# Altium PCB pulse_generator.PcbDoc
Units mm, origin at the board's own origin, x right, y up, seen from the top; angles counter-clockwise.
Board outline 77 x 87 mm, 2 copper layers (Top Layer, Bottom Layer); 35 components, 21 nets, 100 pads, 0 vias.
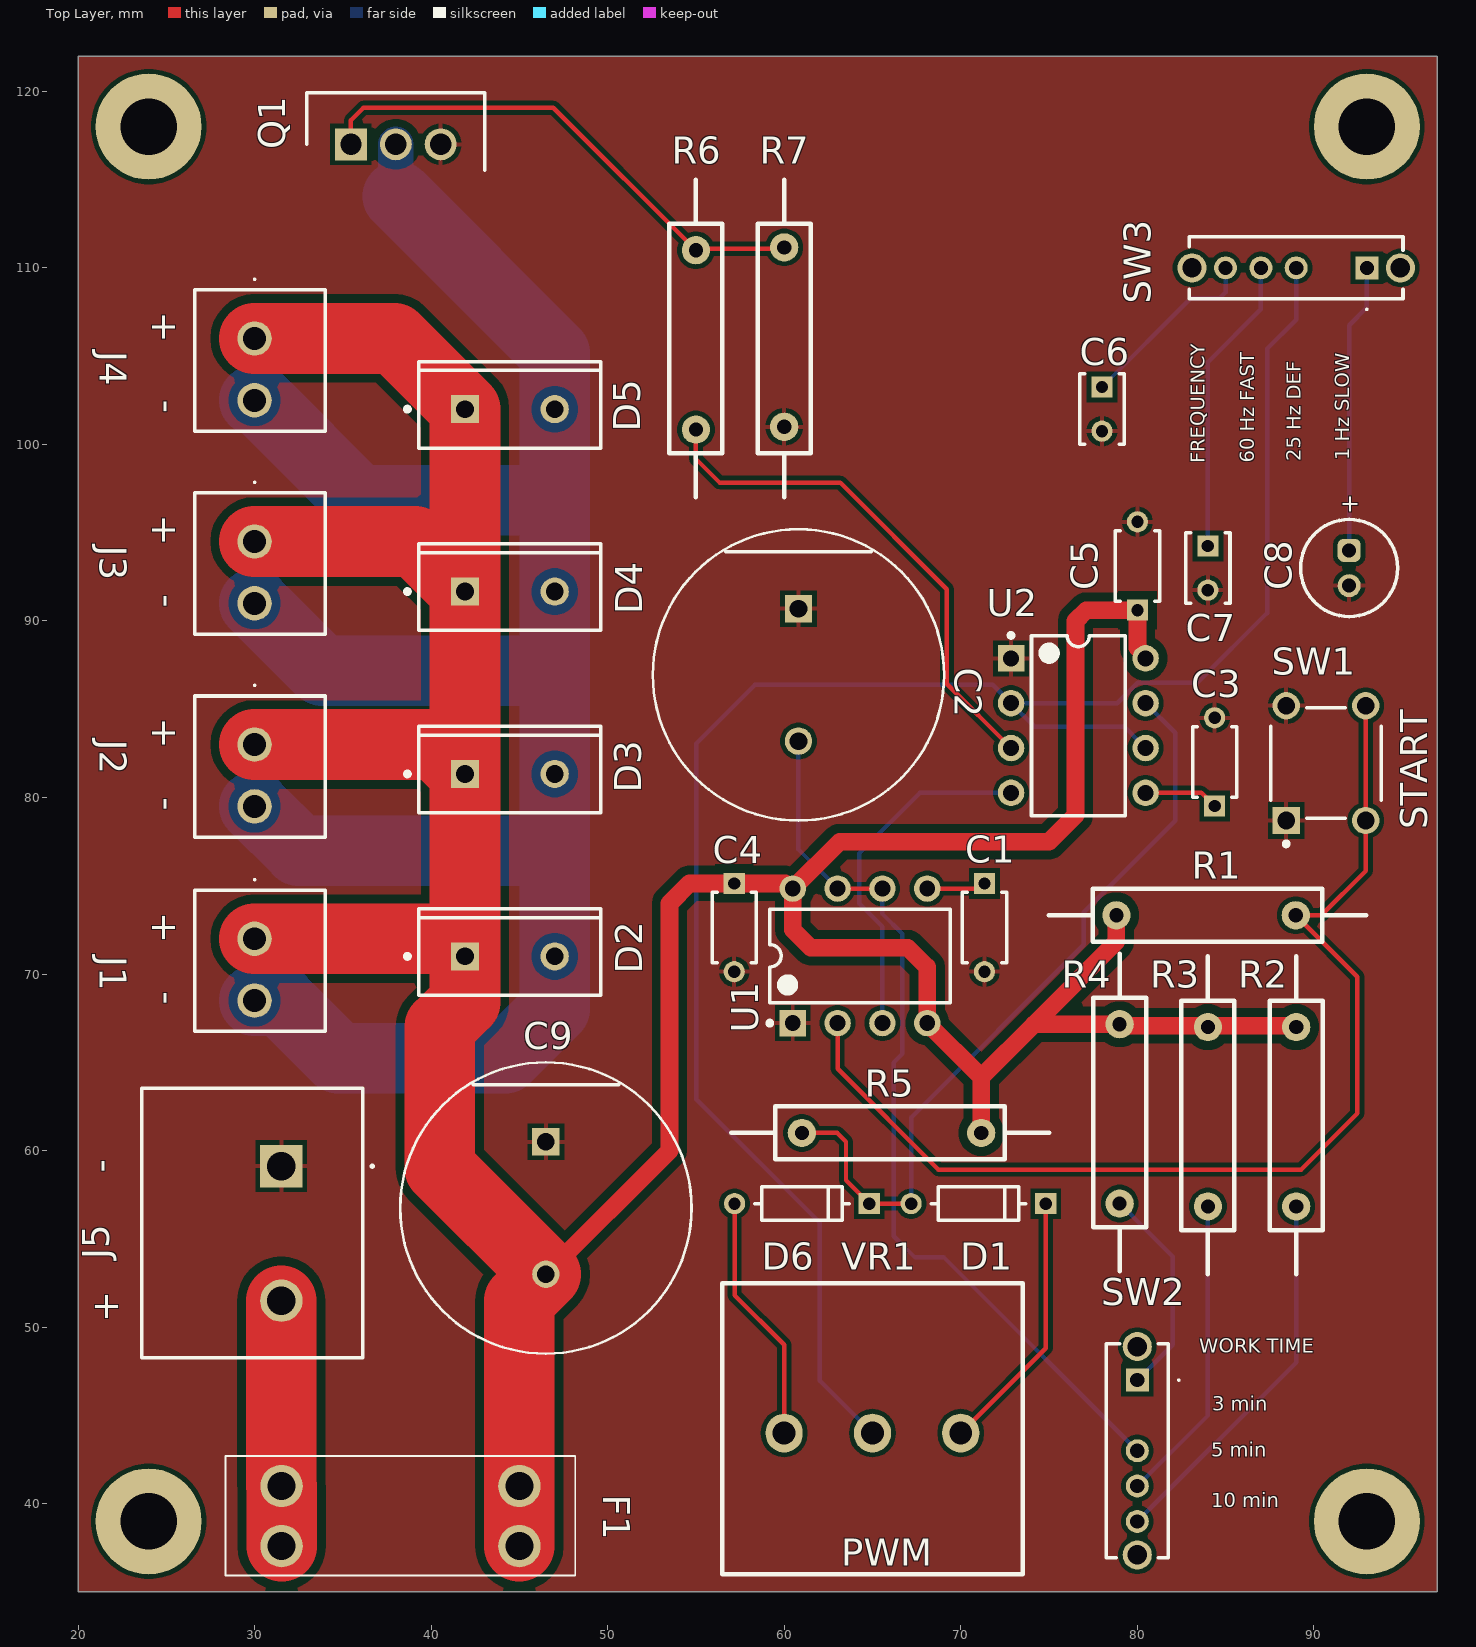
[diagram p0: Top Layer view]
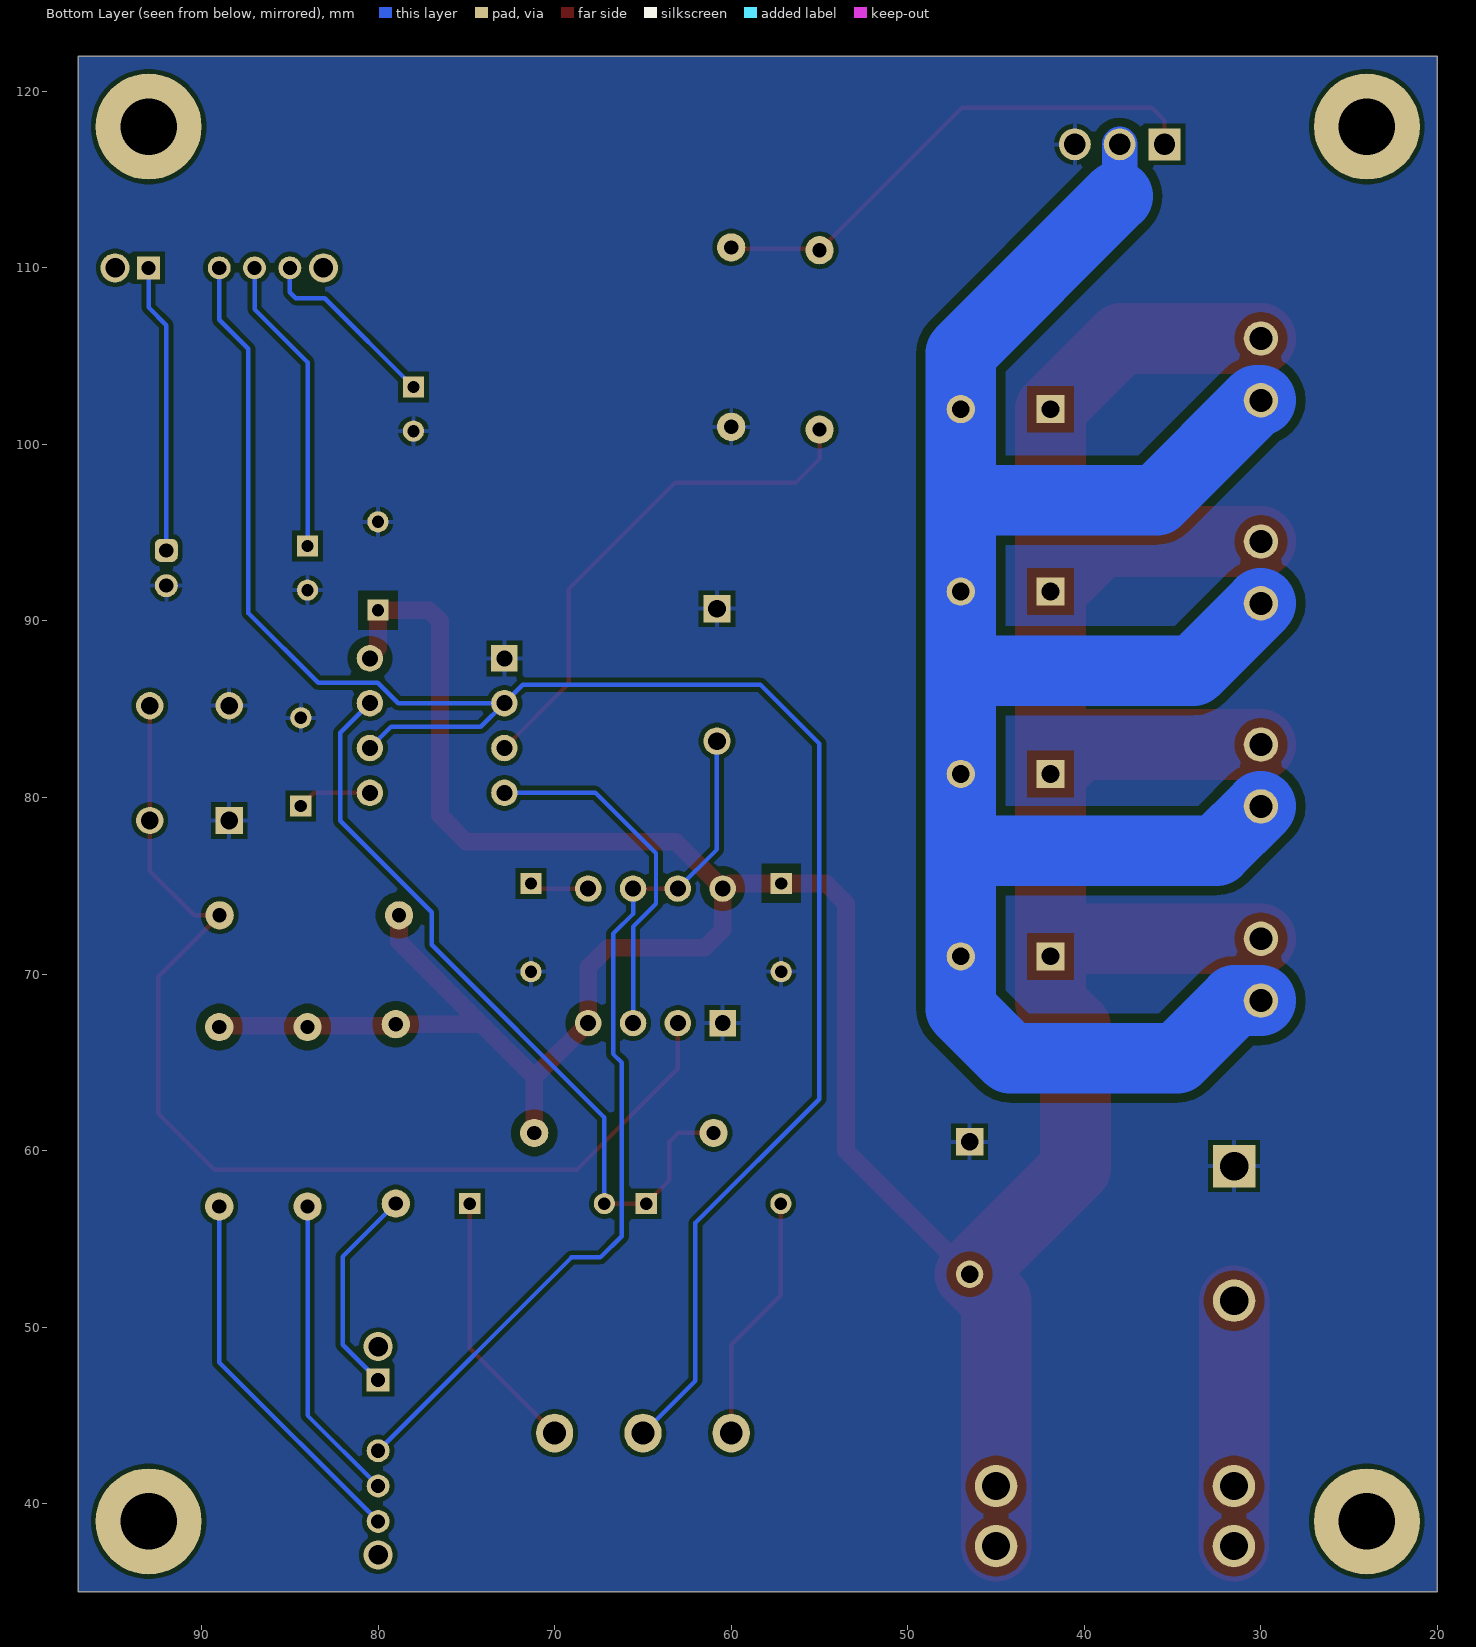
[diagram p1: Bottom Layer view, seen from below]
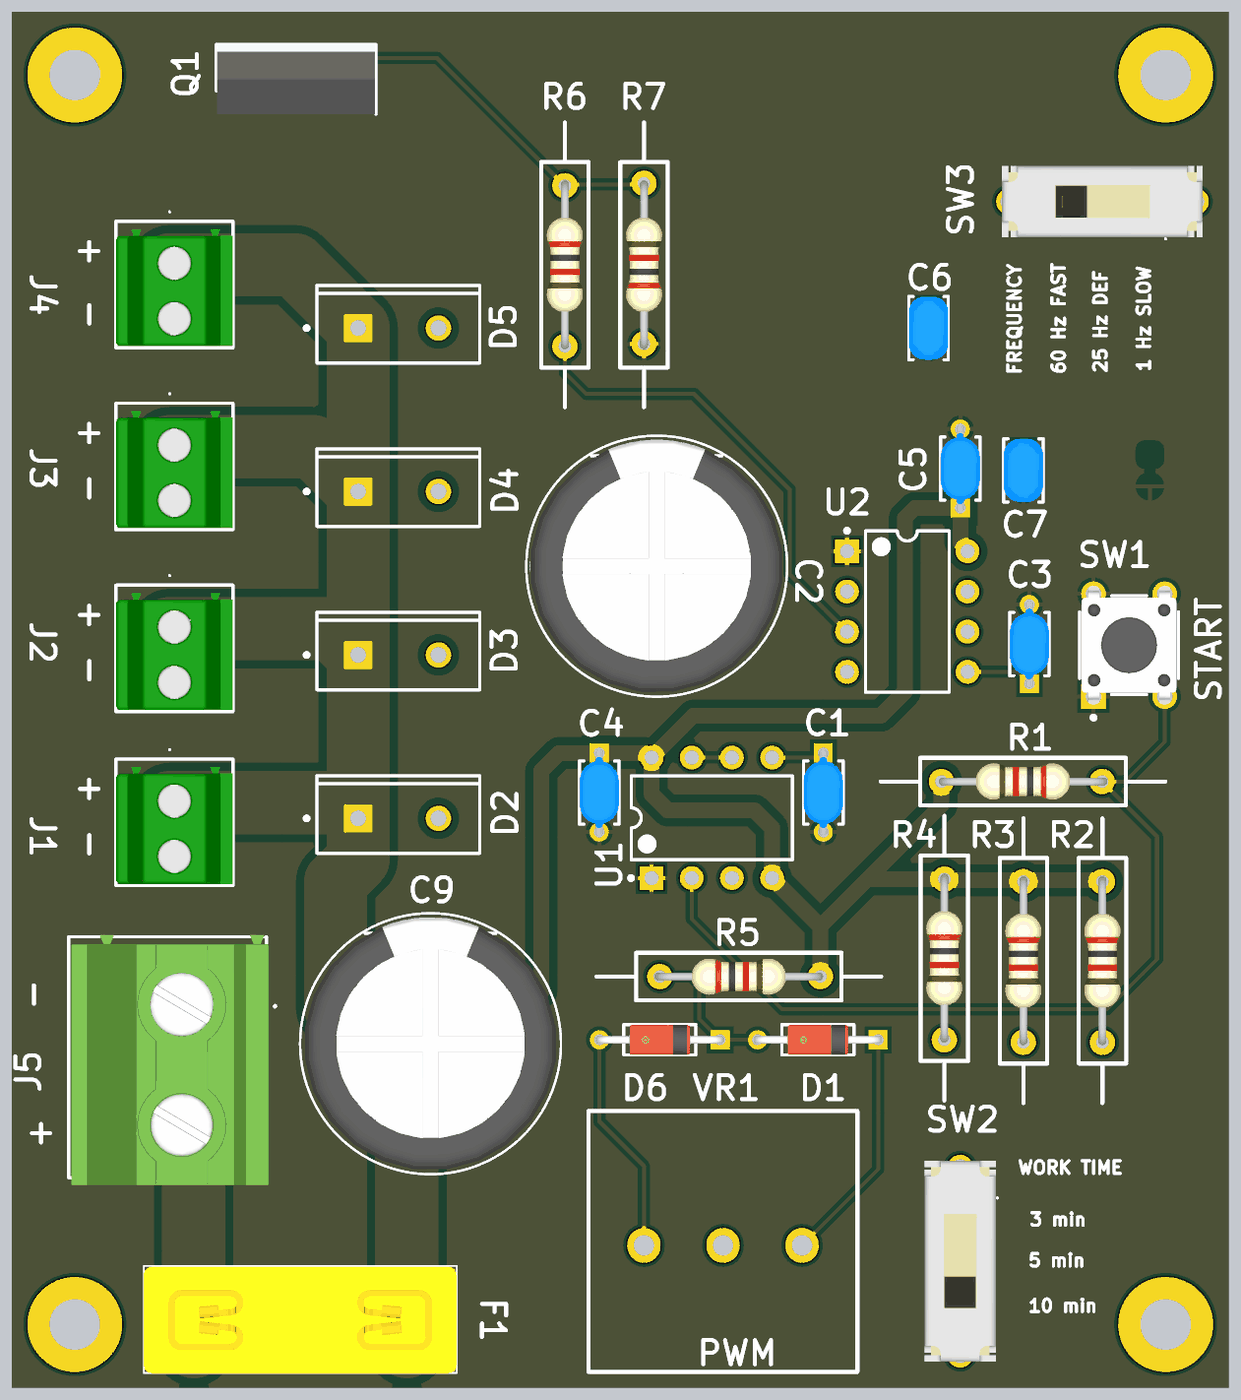
[diagram p2: 3D render of the assembled board from above, using the file's embedded part models]

## Layer stack, top to bottom
Top Solder: solder mask 0.0102, Solder Resist, Dk 3.5
Top Layer: signal copper 0.0356
Dielectric 1: dielectric 0.32, FR-4, Dk 4.8
Bottom Layer: signal copper 0.0356
Bottom Solder: solder mask 0.0102, Solder Resist, Dk 3.5

## Board outline
20,35 97,35 97,122 20,122

## Design rules (kind name [scope] priority, off if disabled: settings)
BoardOutlineClearance [All] p1 off: gap=-2 ignorepadtopadclearanceinfootprint=FALSE
Clearance Clearance_Q1 [InComponent('Q1') vs InComponent('Q1')] p1: gap=0.254 ignorepadtopadclearanceinfootprint=FALSE
Clearance Clearance_high_amp [InNetClass('High_Amp')] p2: gap=0.508 ignorepadtopadclearanceinfootprint=FALSE
Clearance [All] p3: gap=0.254 ignorepadtopadclearanceinfootprint=FALSE
HoleSize [All] p1: absolutevalues=TRUE maxlimit=10 minlimit=0.025 maxpercent=80.000 minpercent=20.000
MinimumSolderMaskSliver [All] p1: minsoldermaskwidth=0.1
PolygonConnect [All] p1: connectstyle=Relief reliefconductorwidth=0.254 reliefentries=4 polygonreliefangle="90 Angle" airgapwidth=0.254
RoutingVias [All] p1: holewidth=0.711 width=1.27 viastyle="Through Hole" minholewidth=0.711 minwidth=1.27 maxholewidth=0.711 maxwidth=1.27
SilkToSilkClearance [All] p1: silktosilkclearance=0.1
SilkToSolderMaskClearance [IsPad] p1: minsilkscreentomaskgap=0.01 clearancetoexposedcopper=TRUE
SolderMaskExpansion [All] p1: expansion=0.102 istentingtop=FALSE
SupplyNets "Schematic Supply Nets_1" [InNet('GND')] p1: voltage=0.000
SupplyNets "Schematic Supply Nets" [InNet('VCC')] p2: voltage=0.000
Width High_Amp [InNetClass('High_amp')] p1: maxlimit=15 minlimit=1 preferedwidth=4 minimp=50.000000 maximp=50.000000 favimp=50.000000
Width [All] p2: maxlimit=0.254 minlimit=0.254 preferedwidth=0.254
26 further rules are at their usual default settings.

## Classes and differential pairs
net class High_amp: NetD2_3 NetF1_1 VCC
component class pulse_generator: C1 C2 C3 C4 C5 C6 C7 C8 C9 D1 D2 D3 D4 D5 D6 F1 J1 J2 J3 J4 J5 Q1 R1 R4 R5 R6 SW1 SW2 SW3 U1 U2 VR1

## Components (designator, comment, footprint, x,y, rotation, side; value= is the part's Value field where it differs from the comment)
C1 "RDER71H104K0M1H03A" FP-RDE0M1-MFG 71.344,72.634 r270 top
C2 "EEUTA1C102S" FP-RAD-TH-D_16_0_5-L_15_1-MFG 60.808,86.944 r270 top
C3 "RDER71H104K0M1H03A" FP-RDE0M1-MFG 84.379,82.017 r90 top
C4 "RDER71H104K0M1H03A" FP-RDE0M1-MFG 57.169,72.634 r270 top
C5 "RDER71H104K0M1H03A" FP-RDE0M1-MFG 80.01,93.116 r90 top
C6 "RCER71H224K1DBH03A" FP-RCE1A2-MFG 78,102 r270 top
C7 "RCER71H474K1A2H03B" FP-RCE1A2-MFG 84,93 r270 top
C8 "860020372001" WCAP-ATG5_D5H11 -1178,1363 r90 top
C9 "EEUFK1C222S" FP-RAD-TH-D_16_0_5-L_15_1-MFG 46.5,56.75 r270 top
D1 "1N4148" FP-017AG-MFG 71,57 r180 top
D2 "MBR735G" ONSC-TO-220-2-221B-04_E 44.46,71 r90 top
D3 "MBR735G" ONSC-TO-220-2-221B-04_E 44.46,81.333 r90 top
D4 "MBR735G" ONSC-TO-220-2-221B-04_E 44.46,91.667 r90 top
D5 "MBR735G" ONSC-TO-220-2-221B-04_E 44.46,102 r90 top
D6 "1N4148" FP-017AG-MFG 61,57 r180 top
F1 "3557-20" 3557-20-Footprint-1 31.53,41 r0 top
J1 "YO0201500000G" YO0201500000G-Footprint-1 30,72 r270 top
J2 "YO0201500000G" YO0201500000G-Footprint-1 30,83 r270 top
J3 "YO0201500000G" YO0201500000G-Footprint-1 30,94.5 r270 top
J4 "YO0201500000G" YO0201500000G-Footprint-1 30,106 r270 top
J5 "T70243500000G" T70243500000G-Footprint-1 31.516,59.12 r270 top
Q1 "IRFZ44N" IRFZ44N-Footprint-1 35.46,117 r0 top
R1 "Resistor THT 0.4" "Resistor THT 0.4-Footprint-1" 88.976,73.33 r180 top value=10K
R2 "Resistor THT 0.4" "Resistor THT 0.4-Footprint-1" 89,67 r270 top value=510K
R3 "Resistor THT 0.4" "Resistor THT 0.4-Footprint-1" 84,67 r270 top value=270K
R4 "Resistor THT 0.4" "Resistor THT 0.4-Footprint-1" 79,67.16 r270 top value=160K
R5 "Resistor THT 0.4" "Resistor THT 0.4-Footprint-1" 61,61 r0 top value=1K
R6 "Resistor THT 0.4" "Resistor THT 0.4-Footprint-1" 55,111 r270 top value=100
R7 "Resistor THT 0.4" "Resistor THT 0.4-Footprint-1" 60,101 r90 top value=10K
SW1 "TL1105AF160Q" FP-TL1105AF160Q-MFG 90.686,81.949 r90 top
SW2 "SS-13D01G5" SS-13D01G5-Footprint-1 80,47 r270 top
SW3 "SS-13D01G5" SS-13D01G5-Footprint-1 93,110 r180 top
U1 "NE555P" P0008A 64.294,71.034 r90 top
U2 "NE555P" P0008A 76.657,84.074 r0 top
VR1 "Potentiometer_100k" "New footprint 1" 60,44 r0 top

## Footprints (in the part's own frame and the unit in brackets; to place one, negate y for a bottom-side part, rotate by r counter-clockwise, add the part's x,y. Pads: shape width x height; smd on the part's side, far side on the other; paste and mask are expansions set on the pad)
3557-20-Footprint-1 [mm]
  round 2.4 hole 1.6: 1(0,0) 2(0,-3.4) 3(13.47,-3.4) 4(13.47,0)
  silkscreen extent -3.17,-5.06 16.64,1.7, body extent -3.17,-5.08 16.63,1.65, height 8.16
FP-017AG-MFG [mm]
  rect 1.2x1.2 hole 0.7 paste-2539.97 mask+0: 1(-3.813,0)
  round 1.2 hole 0.7 paste-2539.97 mask+0: 2(3.813,0)
  silkscreen extent -2.68,-0.95 2.68,0.95, body extent -4.51,-1.05 4.51,1.05, height 0.25
FP-RAD-TH-D_16_0_5-L_15_1-MFG [mm]
  rect 1.55x1.55 hole 1 paste-2539.97 mask+0: 1(-3.75,0)
  round 1.55 hole 1 paste-2539.97 mask+0: 2(3.75,0)
  silkscreen extent -8.25,-8.25 8.25,8.25, body extent -8.35,-8.35 8.35,8.35, height 0.25
FP-RCE1A2-MFG [mm]
  rect 1.2x1.2 hole 0.7 paste-2539.97 mask+0: 1(-1.25,0)
  round 1.2 hole 0.7 paste-2539.97 mask+0: 2(1.25,0)
  silkscreen extent -2,-1.25 2,1.25, body extent -2.1,-1.35 2.1,1.35, height 0.25
FP-RDE0M1-MFG [mm]
  rect 1.2x1.2 hole 0.7 paste-2539.97 mask+0: 1(-2.5,0)
  round 1.2 hole 0.7 paste-2539.97 mask+0: 2(2.5,0)
  silkscreen extent -2,-1.25 2,1.25, body extent -3.2,-1.35 3.2,1.35, height 0.25
FP-TL1105AF160Q-MFG [mm]
  rect 1.55x1.55 hole 1 paste-2539.97 mask+0: 1(-3.25,2.25)
  round 1.55 hole 1 paste-2539.97 mask+0: 2(3.25,2.25) 3(-3.25,-2.25) 4(3.25,-2.25)
  silkscreen extent -4.7,-3.13 3.13,3.13, body extent -4.13,-3.22 4.13,3.22, height 0.25
IRFZ44N-Footprint-1 [mm]
  rect 1.815x1.815 / inner round 1.815 / far side rect 1.815x1.815 hole 1.21: 1(0,0)
  round 1.815 hole 1.21: 2(2.54,0) 3(5.08,0)
  silkscreen extent -2.51,-1.47 7.59,2.93, body extent -2.46,-1.47 7.54,2.93, height 18.6
"New footprint 1" [mm]
  oval 2.1x2.2 hole 1.3: 1(0,0) 2(5,0) 3(10,0)
  silkscreen extent -3.5,-8 13.5,8.5, body extent -4.29,-21 14,7, height 23.15
ONSC-TO-220-2-221B-04_E [mm] "FM, 2-Leads, Body 10.3x4.85mm, Pitch 5.08mm"
  rect 1.6x1.6 hole 1: 1(0,2.54)
  round 1.6 hole 1: 3(0,-2.54)
  silkscreen extent -2.2,-5.15 2.7,5.92, body extent -2.18,-5.15 2.67,5.15, height 19.05
P0008A [mm] "DIP, 8-Leads, Body 10.15x6.6mm, Pitch 2.54mm"
  rect 1.5x1.5 hole 0.9: 1(-3.81,3.81)
  round 1.5 hole 0.9: 2(-3.81,1.27) 3(-3.81,-1.27) 4(-3.81,-3.81) 5(3.81,-3.81) 6(3.81,-1.27) 7(3.81,1.27) 8(3.81,3.81)
  silkscreen extent -3.93,-5.1 2.65,5.23, body extent -3.95,-5.07 3.95,5.07, height 5.08
"Resistor THT 0.4-Footprint-1" [mm]
  round 1.6 hole 0.8: 1(0,0) 2(10.16,0)
  silkscreen extent -4,-1.5 14,1.5, body extent -0.33,-1.15 10.33,1.14, height 3.13
SS-13D01G5-Footprint-1 [mm]
  rect 1.3x1.3 hole 0.8: 1(0,0)
  round 1.3 hole 0.8: 2(4,0) 3(6,0) 4(8,0)
  round 1.65 hole 1.1: MH1(-1.9,0) MH2(9.9,0)
  silkscreen extent -2.05,-1.75 10.05,2.4, body extent -2.35,-2.25 10.35,2.25, height 9.7
T70243500000G-Footprint-1 [mm]
  rect 2.4x2.4 hole 1.6: 1(0,0)
  round 2.4 hole 1.6: 2(7.62,0)
  silkscreen extent -4.4,-7.9 10.84,5.2, body extent -4.52,-7.75 11.32,4.75, height 21.8
WCAP-ATG5_D5H11 [mm] "Aluminum Electrolytic Capacitors, 5x11mm"
  rrect50% 1.3x1.3 hole 0.8: 1(-1269,-1270)
  round 1.3 hole 0.8: 2(-1271,-1270)
  silkscreen extent -1272.75,-1272.75 -1267.25,-1267.25, body extent -1272.49,-1272.5 -1267.5,-1267.5, height 11.31
YO0201500000G-Footprint-1 [mm]
  round 1.95 hole 1.3: 1(0,0) 2(3.5,0)
  silkscreen extent -3.4,-3.4 5.25,4, body extent -2.25,-3.4 5.15,4, height 8.5

## Part data
C1 C3 C4 C5: library part CMP-06035-051680-1, "Ceramic Capacitor 100nF ±10% 50V X7R Radial", Capacitance=100nF, Case/Package=Radial, Dielectric=X7R, Max Operating Temperature=125°C, Min Operating Temperature=-55°C, Package Quantity=2000, Resistor Type=Ceramic, Tolerance=10%, Voltage Rating=50V, Height=3.5mm, Height - Seated (Max)=0.236inch, Lead Diameter=0.5mm, Lead Free="Lead Free", Lead Pitch=0.197inch, Lead/Base Style=Kinked, Length=0.157inch, Mount="Through Hole", Packaging="Tape and Reel", Termination=Radial, Voltage Rating (DC)=50V, Width=3.5mm
C2: library part CMP-05427-001230-1, "Aluminum Electrolytic Capacitors (Radial Lead Type) AEC-Q200 Qualified 1000uF ±20% 16V", Capacitance=1mF, Case/Package=Radial, ESR (Equivalent Series Resistance)=47mR, Max Operating Temperature=125°C, Min Operating Temperature=-40°C, Package Quantity=100, Ripple Current=1.52A, Tolerance=20%, Voltage Rating=16V, Diameter=16mm, Height=15mm, Height - Seated (Max)=0.65inch, Impedance=47mR, Lead Diameter=0.8mm, Lead Pitch=7.5mm, Length=15mm, Life (Hours)=2000Hour, Mount="Through Hole", Number of Pins=2, Packaging=Bulk, Radiation Hardening=No, REACH SVHC="No SVHC", RoHS Compliant=Yes, Series=TA, Termination=Radial, Voltage Rating (DC)=16V
C6: library part CMP-06035-041225-1, "Cap Ceramic 220nF 50V X7R ±10% Radial 2.5mm +125°C Automotive Ammo Pack", Capacitance=220nF, Case/Package=Radial, Dielectric=X7R, Max Operating Temperature=125°C, Min Operating Temperature=-55°C, Package Quantity=2000, Ratings=AEC-Q200, Resistor Type=Ceramic, Tolerance=10%, Voltage Rating=50V, Height=3.5mm, Height - Seated (Max)=0.138inch, Lead Diameter=0.5mm, Lead Pitch=0.098inch, Lead/Base Style=Straight, Length=0.157inch, Mount="Through Hole", Packaging="Tape and Reel", Termination=Radial, Voltage Rating (DC)=50V, Width=0.098inch
C7: library part CMP-06035-009921-1, "Cap Ceramic 470nF 50V X7R ±10% Radial 2.5mm +125°C Automotive Bulk", Capacitance=470nF, Case/Package=Radial, Dielectric=X7R, Max Operating Temperature=125°C, Min Operating Temperature=-55°C, Package Quantity=500, Ratings=AEC-Q200, Resistor Type=Ceramic, Tolerance=10%, Voltage Rating=50V, Height=3.5mm, Height - Seated (Max)=0.138inch, Lead Diameter=0.5mm, Lead Pitch=0.098inch, Lead/Base Style=Straight, Length=0.157inch, Mount="Through Hole", Packaging=Bulk, Termination=Radial, Voltage Rating (DC)=50V, Width=0.098inch
C8: library part CMP-03913-53914165-2, "WCAP-ATG5 Aluminum Electrolytic Capacitors", Capacitance=10µF, Case/Package=Radial, Leakage Current=3µA, Max Operating Temperature=105°C, Min Operating Temperature=-40°C, Ripple Current=35mA, Tolerance=20%, Voltage Rating=16V, Diameter=5mm, Height=11mm, Height - Seated (Max)=12.4968mm, Lead Pitch=2.0066mm, Length=11mm, Life (Hours)=2000hours, Material=Aluminium, Mount="Through Hole", Packaging="Tape & Box (TB)", Pitch=2mm, Polarity=Polar, REACH SVHC=Unknown, RoHS=Compliant, Voltage Rating (DC)=16V
C9: library part CMP-05427-001148-1, "Aluminum Electrolytic Capacitors (Radial Lead Type) AEC-Q200 Qualified 2200uF ±20% 16V", Capacitance=2.2mF, Case/Package=Radial, Dielectric Material=Aluminium, Max Operating Temperature=105°C, Min Operating Temperature=-55°C, Ripple Current=1.8A, Tolerance=20%, Voltage=16V, Construction=RADIAL, Diameter=16mm, Height=15mm, Impedance=38mR, Lead Diameter=0.8mm, Lead Pitch=7.5mm, Life (Hours)=5000Hour, Mount="Through Hole", Number of Pins=2, Packaging=Bulk, Radiation Hardening=No, REACH SVHC="No SVHC", RoHS Compliant=Yes, Series="FK Radial", Termination=Radial, Voltage Rating=16V, Voltage Rating (DC)=16V
D1 D6: library part CMP-07163-000046-1, "DIODE GEN PURP 100V 200MA DO35", Average Rectified Current=200mA, Capacitance=4pF, Case/Package=DO-35, Current=4A, Forward Current=300mA, Forward Voltage=1V, Max Forward Surge Current (Ifsm)=1A, Max Operating Temperature=175°C, Max Power Dissipation=500mW, Max Repetitive Reverse Voltage (Vrrm)=100V, Max Reverse Current=5uA, Min Operating Temperature=-65°C, Package Quantity=2000, Contact Plating=Tin, Current Rating=200mA, Diameter=1.91mm, Element Configuration=Single, Height=4.56mm, Lead Free="Lead Free", Length=4.56mm, Max Reverse Voltage (DC)=100V, Max Surge Current=4A, Mount="Through Hole", Number of Pins=2, Output Current=200mA, Outside Diameter=1.85mm, Packaging=Bulk, Peak Non-Repetitive Surge Current=4A, Polarity=Standard, Power Dissipation=500mW, Radiation Hardening=No, REACH SVHC="No SVHC", Recovery Time=4ns, Reverse Recovery Time=4ns, Reverse Voltage=100V, Series=-, Voltage=100V, Voltage Rating (DC)=100V, Weight=0.01lb, Width=1.91mm
D2 D3 D4 D5: library part CMP-1055-00596-1, "SWITCHMODE(TM) Power Rectifier, 2-Pin TO-220, Pb-Free, Tube", Manufacturer="On Semiconductor", ComponentLink1Description="Manufacturer URL", ComponentLink1URL=http://www.onsemi.com/, ComponentLink2Description=Datasheet, ComponentLink2URL=http://www.onsemi.cn/pub_link/Collateral/MBR735-D.PDF, ComponentLink3Description="Package Specification", ComponentLink3URL=http://www.onsemi.com/pub_link/Collateral/BYW29-D.PDF, Configuration=Single, DatasheetVersion="Rev. 8", IFSM Max (A)=150, Mounting Technology="Through Hole", PackageDescription="2-Pin Flange Mount, Vertical Straight Lead, Body 9.97 x 4.44 mm, Pitch 5.08 mm", PackageReference=TO-220-2-221B-04_E, PackageVersion="Rev. E", Packing=Tube, PartNumber=MBR735G, RoHS=TRUE
F1: library part CMP-005-00013-1, "Fuse Holder T/H 2 IN 1 AUTO BLDE HOLDER, YELLOW 20A"
J1 J2 J3 J4: library part CMP-002-00073-1, "Conn Terminal Block 2 POS 3.5mm Solder ST Thru-Hole 10A/Contact Box", Voltage Rating=300V, Pins=2
J5: library part CMP-002-00072-1, "Terminal Block 2P", Max Operating Temperature=115°C, Min Operating Temperature=-40°C, Voltage Rating=300V, Pins=2
Q1: library part CMP-004-00031-1, "N-Channel MOSFET Transistor"
R1 R2 R3 R4 R5 R6 R7: library part CMP-009-00181-2, "Resistor THT axial 0.4"
SW1: library part CMP-17879-000016-1, "SWITCH TACTILE SPST-NO 0.05A 12V", Color=Black, Contact Current Rating=50mA, Contact Resistance=100mR, Max Operating Temperature=70°C, Max Voltage Rating (DC)=50V, Min Operating Temperature=-20°C, Operating Force=160gf, Package Quantity=750, Voltage Rating (DC)=12V, Actuator Length=1.4mm, Actuator Material=Nylon, Actuator Type=Standard, Contact Material=Bronze, Contact Plating=Silver, Current Rating=50mA, Electrical Life=100000Cycles, Housing Material=Nylon, Illumination Type=Non-Illuminated, Lead Free="Lead Free", Length=6mm, Mechanical Life=100000Cycles, Mount="Through Hole", Orientation=Straight, Packaging=Bulk, Reach SVHC Compliant=Yes, RoHS Compliant=Yes, Series=TL1105, Size=6mm, Switch Function=Off-Mom, Switch Travel=0.25mm, Termination="PC Pin", Throw Configuration=SPST, Width=6mm
SW2 SW3: library part CMP-002-00071-3, "Switch Slide 3 Position SP3T", Mounting Technology=THT, Number of Positions=3
U1 U2: library part CMP-2000-04954-1, "Precision Timer, 4.5 to 16 V, 0 to 70 degC, 8-Pin DIP, Pb-Free, Tube", Manufacturer=TexasInstruments, Maximum High Level Output Current=-200mA, Maximum Low Level Output Current=200mA, Operating Supply Voltage=5, Package=8PDIP, Package Description="8-Pin Double In-line Package, Body 9.59 x 6.35 mm, Pitch 2.54 mm", Package Reference=P8, Category=Timer, Datasheet URL=http://www.ti.com/general/docs/lit/getliterature.tsp?genericPartNumber=NE555&fileType=pdf, Datasheet Version="Rev. I, 09/2014", Manufacturer URL=http://www.ti.com/, Number of Internal Timers=1, Package URL=http://www.ti.com/lit/ml/mpdi001b/mpdi001b.pdf, Packaging=Rail/Tube, Rad Hard=No, Type=Standard
VR1: library part CMP-009-00179-1, "Potencjometr osiowy 100k liniowy PCB"

## Free pads (board coordinates)
  round 6 hole 3.2: 1(24,39) 1(24,118) 1(93,39) 1(93,118)

## Nets (pads, with @x,y where several pads share a name; then routed paths per layer and width w, separated by ;. In a path a pad name is that pad's centre, name@x,y a point inside that pad or via, vN(x,y) a via of type N, cw(c..) or ccw(c..) an arc to the next point about the centre after c; other vN are vias at no path point)
GND: C1.2 C2.1 C3.2 C4.2 C5.2 C6.2 C7.2 C8.2 C9.1 J5.1 Q1.3 R7.1 SW1.1 SW1.2 U1.1 U2.1
MASTER_OUT: U1.3 U2.4 | length 20.2
  Bottom Layer w0.254: U1.3 65.564,72.688 64.262,73.99 64.262,76.835 67.691,80.264 U2.4
NetC1_1: C1.1 U1.5 | length 3.4
  Top Layer w0.254: U1.5 71.054,74.844 C1.1
NetC3_1: C3.1 U2.5 | length 4.2
  Top Layer w0.254: U2.5 83.631,80.264 C3.1
NetC6_1: C6.1 SW3.4 | length 10.6
  Bottom Layer w0.254: C6.1 83.03,108.28 84.658,108.28 85,108.622 SW3.4
NetC7_1: C7.1 SW3.3 | length 17
  Bottom Layer w0.254: C7.1 84,104.65 87,107.65 SW3.3
NetC8_1: C8.1 SW3.1 | length 16.4
  Bottom Layer w0.254: C8.1 92,106.757 93,107.757 SW3.1
NetD1_1: D1.1 VR1.3 | length 15
  Top Layer w0.254: VR1.3 74.813,48.813 D1.1
NetD2_3: D2.3 D3.3 D4.3 D5.3 J1.2 J2.2 J3.2 J4.2 Q1.2 | length 128.2
  Bottom Layer w2: Q1.2 38,114.403 38.113,114.291
  Bottom Layer w4: J1.2 31.474,68.5 34.747,65.227 44.196,65.227 47,68.031 D2.3 47,77.292 ; J2.2 32.513,76.987 46.695,76.987 47,77.292 ; J3.2 33.827,87.173 46.721,87.173 47,87.452 ; J4.2 30.24,102.5 35.907,96.833 47,96.833 ; 38.113,114.059 47,105.171 47,96.833 ; 47,77.292 D3.3 47,87.452 ; 47,87.452 D4.3 47,96.833
NetD6_2: D6.2 VR1.1 | length 14.2
  Top Layer w0.254: D6.2 57.187,51.813 60,49 VR1.1
NetF1_1: F1.1 F1.2 J5.2 | length 13.9
  Top Layer w4: J5.2 31.516,41.014 F1.1 F1.2
NetQ1_1: Q1.1 R6.1 R7.2 | length 29.6
  Top Layer w0.254: Q1.1 35.46,118.366 36.17,119.075 46.925,119.075 R6.1 55.08,111.08 59.92,111.08 R7.2
NetR1_1: R1.1 SW1.3 SW1.4 U1.2 | length 62.7
  Top Layer w0.254: U1.2 63.024,64.636 68.732,58.928 89.281,58.928 92.456,62.103 92.456,69.85 R1.1 90.424,73.33 92.936,75.842 SW1.3 SW1.4
NetR2_2: R2.2 SW2.4 | length 21.6
  Bottom Layer w0.254: SW2.4 89,48 R2.2
NetR3_2: R3.2 SW2.3 | length 17.5
  Bottom Layer w0.254: SW2.3 84,45 R3.2
NetR4_2: R4.2 SW2.1 | length 12.1
  Bottom Layer w0.254: R4.2 82,54 82,49 SW2.1
SLV_DIS: D1.2 D6.1 R5.1 U2.7 | length 44.4
  Top Layer w0.254: R5.1 63,61 63.5,60.5 63.5,58.313 D6.1 D1.2
  Bottom Layer w0.254: D1.2 67.187,61.878 76.962,71.653 76.962,73.505 82.144,78.687 82.144,83.668 U2.7
SLV_OUT: R6.2 U2.3 | length 29.4
  Top Layer w0.254: R6.2 55,99.178 56.337,97.841 63.17,97.841 69.215,91.796 69.215,86.436 U2.3
SLV_TR_THR: SW3.2 U2.2 U2.6 VR1.2 | length 108.4
  Bottom Layer w0.254: VR1.2 62.027,46.973 62.027,55.905 55.016,62.916 55.016,83.058 58.344,86.385 71.806,86.385 U2.2 ; U2.6 79.271,84 74.191,84 U2.2 ; SW3.2 89,107.059 87.351,105.41 87.351,90.449 83.4,86.499 80.023,86.499 78.868,85.344 U2.2
TM_SW: C2.2 SW2.2 U1.6 U1.7 | length 51
  Top Layer w0.254: U1.7 U1.6
  Bottom Layer w0.254: C2.2 60.808,77.06 U1.7 ; U1.6 65.564,73.407 66.695,72.276 66.695,65.476 66.206,64.987 66.206,55.155 67.412,53.95 69.05,53.95 SW2.2
VCC: C4.1 C5.1 C9.2 D2.1 D3.1 D4.1 D5.1 F1.3 F1.4 J1.1 J2.1 J3.1 J4.1 R1.2 R2.1 R3.1 R4.1 R5.2 U1.4 U1.8 U2.8 | length 235.4
  Top Layer w1: C9.2 53.5,60 53.5,74 54.634,75.134 C4.1 60.059,75.134 60.349,74.844 U1.8 ; R5.2 71.16,64.168 ; R1.2 78.816,71.824 74.152,67.16 ; U2.8 80.467,88.019 80.01,88.476 C5.1 77.116,90.616 76.5,90 76.5,79 75,77.5 63.14,77.5 U1.8 ; R2.1 88.92,67.08 79.08,67.08 R4.1 74.152,67.16 ; U1.8 60.5,74.828 60.484,74.812 60.484,72.516 61.5,71.5 67,71.5 68.104,70.396 U1.4 71.16,64.168 ; 71.16,64.168 74.152,67.16
  Top Layer w4: J1.1 40.92,72 D2.1 ; J2.1 40.253,83 D3.1 ; J3.1 39.087,94.5 D4.1 ; J4.1 37.92,106 D5.1 D4.1 ; F1.3 F1.4 45,51.5 C9.2 40.5,59 40.5,67 41.92,68.42 D2.1 ; D2.1 D3.1 ; D3.1 D4.1
pads on no net: SW2.MH1 SW2.MH2 SW3.MH1 SW3.MH2

## Polygon pours and split planes (outlines as drawn)
GND on Top Layer "GND_L01_P000" (solid, pour order 0): 20,122 20,35 97,35 97,122
GND on Bottom Layer "GND_L02_P001" (solid, pour order 1): 20,122 20,35 97,35 97,122

## Silkscreen, mask and mechanical layers (free items; w line width, h text height)
Top Overlay:
  text "+" at 25.5,105.754 h1.52 r90
  text "-" at 25.508,101.754 h1.52 r90
  text "1 Hz SLOW" at 91.999,99.111 h0.8 r90
  text "25 Hz DEF" at 89.256,99.035 h0.8 r90
  text "60 Hz FAST" at 86.614,98.958 h0.8 r90
  text "FREQUENCY" at 83.821,98.929 h0.8 r90
  text "+" at 25.5,94.254 h1.52 r90
  text "-" at 25.508,90.754 h1.52 r90
  text "+" at 25.5,82.754 h1.52 r90
  text "-" at 25.508,79.254 h1.52 r90
  text "START" at 96.432,78.203 h1.52 r90
  text "+" at 25.5,71.754 h1.52 r90
  text "-" at 25.508,68.254 h1.52 r90
  text "-" at 22.008,58.754 h1.52 r90
  text "+" at 20.754,50.5 h1.52
  text "WORK TIME" at 83.515,48.539 h0.8
  text "3 min" at 84.254,45.254 h0.8
  text "5 min" at 84.176,42.672 h0.8
  text "10 min" at 84.178,39.803 h0.8
  text "PWM" at 63.221,36.474 h1.52

## Text inside footprints (layer, text, board x,y; h text height)
C8: Top Overlay "+" at 92.5,96.05 h1 r90